# Altium PCB V3.PcbDoc
Units mm, origin at the board's own origin, x right, y up, seen from the top; angles counter-clockwise.
Board outline 63 x 97.64 mm, 2 copper layers (Top Layer, Bottom Layer); 52 components, 39 nets, 195 pads, 74 vias.
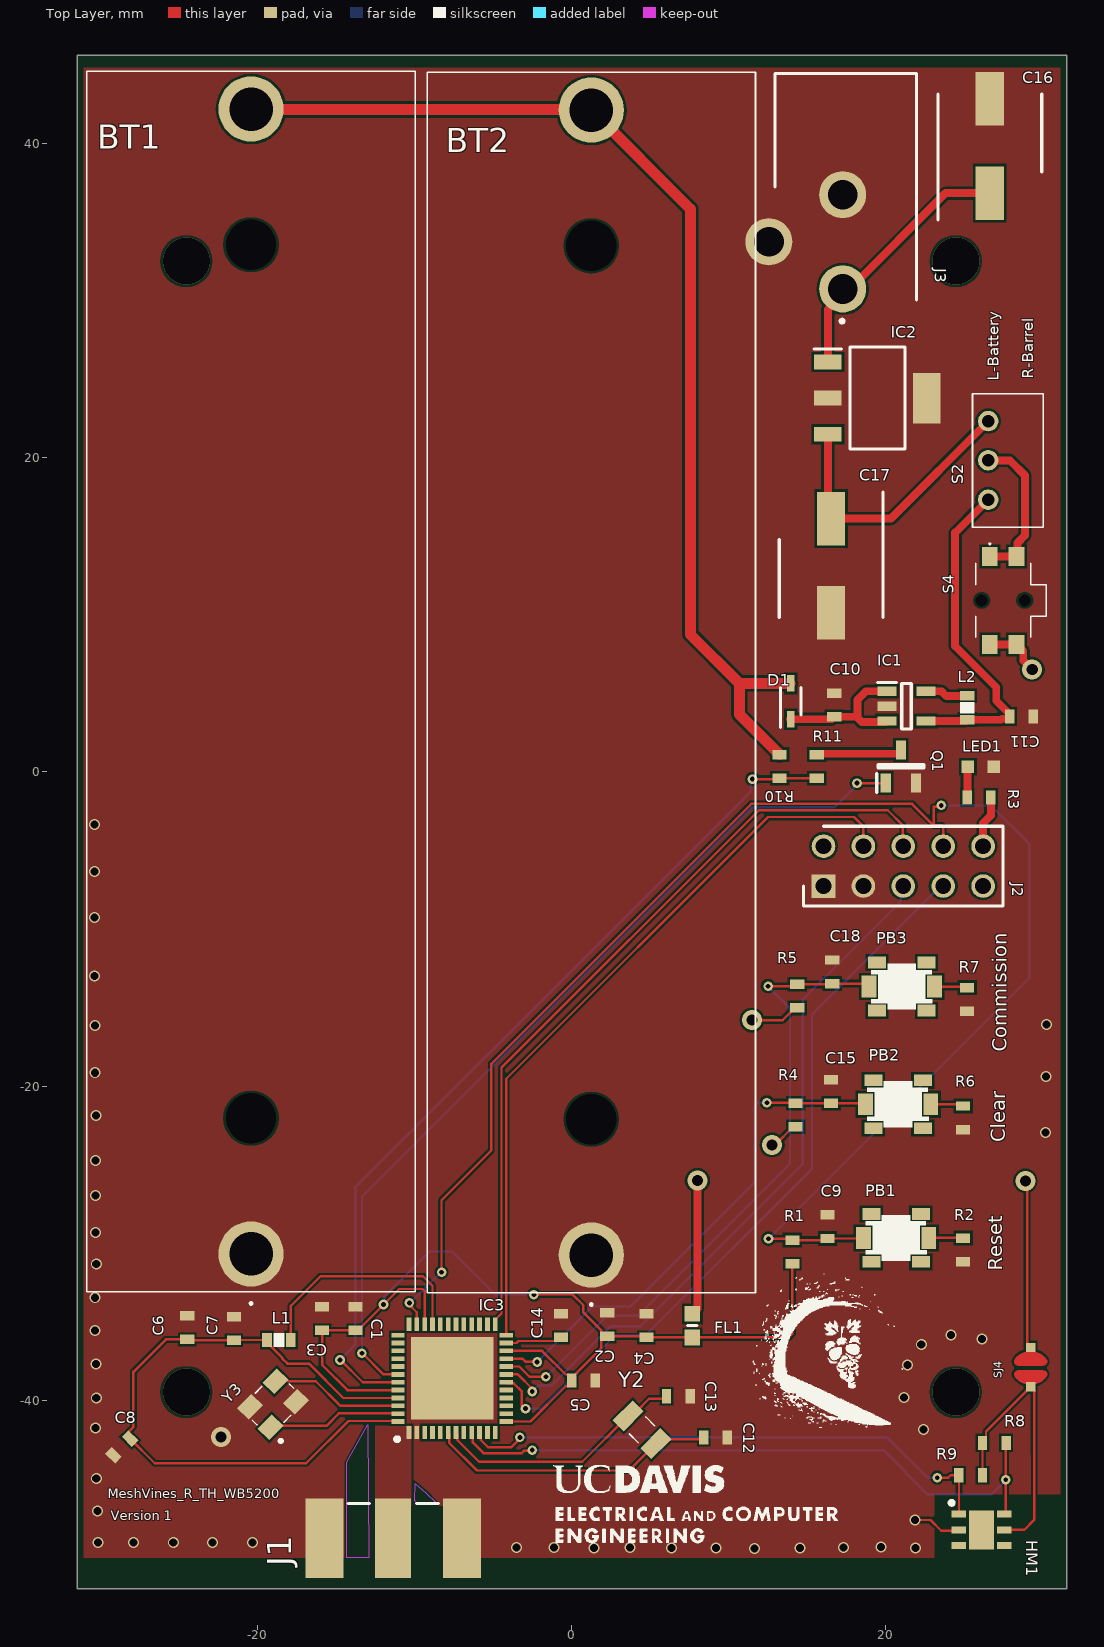
[diagram p0: Top Layer view]
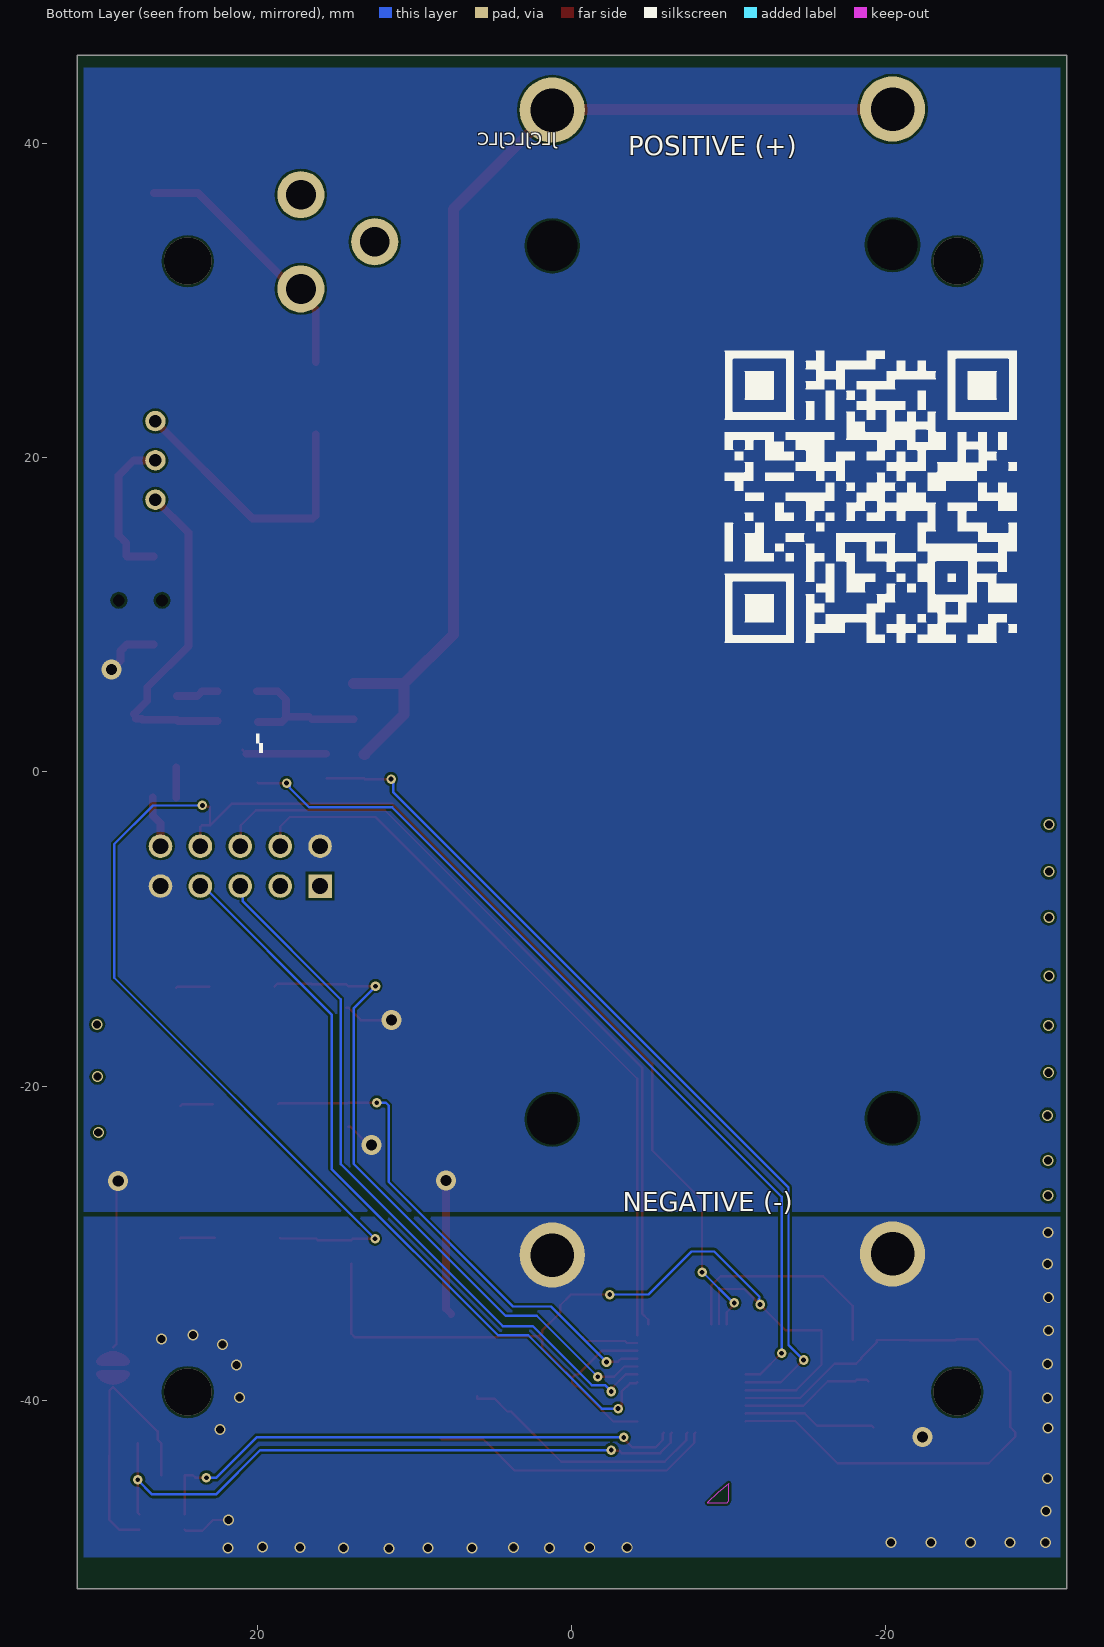
[diagram p1: Bottom Layer view, seen from below]

## Layer stack, top to bottom
Top Solder: solder mask 0.0102, Solder Resist, Dk 3.5
Top Layer: signal copper 0.0356
Dielectric 1: dielectric 0.32, FR-4, Dk 4.8
Bottom Layer: signal copper 0.0356
Bottom Solder: solder mask 0.0102, Solder Resist, Dk 3.5

## Board outline
-31.5,-52 -31.5,45.644 31.5,45.644 31.5,-52

## Design rules (kind name [scope] priority, off if disabled: settings)
BoardOutlineClearance [All] p1: gap=0.406 ignorepadtopadclearanceinfootprint=FALSE except(0: Arc-SplitContinuation Track-SplitContinuation SMDPad-SplitContinuation THPad-SplitContinuation Via-SplitContinuation Fill-SplitContinuation Poly-SplitContinuation Region-SplitContinuation Text-SplitContinuation)
Clearance Clearance_1 [(InNet('RF_P_2_4') AND InComponent('U3'))] p1: gap=0.254 ignorepadtopadclearanceinfootprint=FALSE except(0: Arc-Arc Arc-Track Arc-Fill Arc-Poly Arc-Region Arc-Hole Track-Track Track-Fill Track-Poly Track-Region Track-Hole SMDPad-Hole THPad-Hole Via-Hole Fill-Fill Fill-Poly Fill-Region Fill-Hole Poly-Poly Poly-Region Poly-Hole Region-Region Region-Hole Text-Hole)
Clearance [All] p2: gap=0.152 ignorepadtopadclearanceinfootprint=FALSE
HoleSize [All] p1: absolutevalues=TRUE maxlimit=6.223 minlimit=0.305 maxpercent=80.000 minpercent=20.000
MinimumSolderMaskSliver [All] p1 off: minsoldermaskwidth=0.254
NetAntennae [All] p1 off: netantennaetolerance=0
PolygonConnect PolygonConnect_7 [All vs IsNamedPolygon('Top Layer-GND')] p1: connectstyle=Direct reliefconductorwidth=0.254 reliefentries=4 polygonreliefangle="90 Angle" airgapwidth=0.254
PolygonConnect PolygonConnect_6 [All vs IsNamedPolygon('Bottom Layer-V_Select')] p2: connectstyle=Direct reliefconductorwidth=0.254 reliefentries=4 polygonreliefangle="90 Angle" airgapwidth=0.254
PolygonConnect PolygonConnect_5 [All vs IsNamedPolygon('Top Layer-GND')] p3: connectstyle=Direct reliefconductorwidth=0.254 reliefentries=4 polygonreliefangle="90 Angle" airgapwidth=0.254
PolygonConnect PolygonConnect_4 [All vs IsNamedPolygon('Bottom Layer-GND')] p4: connectstyle=Direct reliefconductorwidth=0.254 reliefentries=4 polygonreliefangle="90 Angle" airgapwidth=0.254
PolygonConnect PolygonConnect_3 [All vs IsNamedPolygon('Top Layer-GND')] p5: thpad.connectstyle=Direct thpad.reliefconductorwidth=0.254 thpad.reliefentries=4 thpad.polygonreliefangle="90 Angle" thpad.airgapwidth=0.254 smdpad.connectstyle=Direct smdpad.reliefconductorwidth=0.254 smdpad.reliefentries=4 smdpad.polygonreliefangle="90 Angle" smdpad.airgapwidth=0.254 via.connectstyle=Relief via.reliefconductorwidth=0.254 via.reliefentries=4 via.polygonreliefangle="90 Angle" via.airgapwidth=0.254
PolygonConnect PolygonConnect_2 [All vs IsNamedPolygon('Top Layer-GND 1')] p6: thpad.connectstyle=Direct thpad.reliefconductorwidth=0.254 thpad.reliefentries=4 thpad.polygonreliefangle="90 Angle" thpad.airgapwidth=0.254 smdpad.connectstyle=Direct smdpad.reliefconductorwidth=0.254 smdpad.reliefentries=4 smdpad.polygonreliefangle="90 Angle" smdpad.airgapwidth=0.254 via.connectstyle=Relief via.reliefconductorwidth=0.254 via.reliefentries=4 via.polygonreliefangle="90 Angle" via.airgapwidth=0.254
PolygonConnect PolygonConnect_1 [All vs IsNamedPolygon('Bottom Layer-GND')] p7: thpad.connectstyle=Direct thpad.reliefconductorwidth=0.254 thpad.reliefentries=4 thpad.polygonreliefangle="90 Angle" thpad.airgapwidth=0.254 smdpad.connectstyle=Direct smdpad.reliefconductorwidth=0.254 smdpad.reliefentries=4 smdpad.polygonreliefangle="90 Angle" smdpad.airgapwidth=0.254 via.connectstyle=Relief via.reliefconductorwidth=0.254 via.reliefentries=4 via.polygonreliefangle="90 Angle" via.airgapwidth=0.254
PolygonConnect antenna_plane [All vs IsNamedPolygon('Top Layer-RF_P_2_4')] p8: thpad.connectstyle=Relief thpad.reliefconductorwidth=0.254 thpad.reliefentries=4 thpad.polygonreliefangle="90 Angle" thpad.airgapwidth=0.254 smdpad.connectstyle=Direct smdpad.reliefconductorwidth=0.254 smdpad.reliefentries=4 smdpad.polygonreliefangle="90 Angle" smdpad.airgapwidth=0.254 via.connectstyle=Relief via.reliefconductorwidth=0.254 via.reliefentries=4 via.polygonreliefangle="90 Angle" via.airgapwidth=0.254
PolygonConnect [All] p9: connectstyle=Relief reliefconductorwidth=0.254 reliefentries=4 polygonreliefangle="90 Angle" airgapwidth=0.254
RoutingVias [All] p1: holewidth=0.305 width=0.61 viastyle="Through Hole" minholewidth=0.152 minwidth=0.305 maxholewidth=0.6 maxwidth=1.2
SilkToSilkClearance [All] p1 off: silktosilkclearance=0.254
SilkToSolderMaskClearance [IsPad] p1 off: minsilkscreentomaskgap=0.254 clearancetoexposedcopper=TRUE
SolderMaskExpansion [All] p1: expansion=0.102
Width [All] p1: maxlimit=2 minlimit=0.152 preferedwidth=0.152 minimp=50.000000 maximp=50.000000 favimp=50.000000
25 further rules are at their usual default settings.

## Classes and differential pairs
component class Sheet3: HM1 R8 R9 SJ4
component class Sheet2: C12 C13 C14 C15 C18 IC3 J1 J2 LED1 PB2 PB3 Q1 R3 R4 R5 R6 R7 R10 R11 Y2 Y3
component class Sheet1: BT1 BT2 C1 C2 C3 C4 C5 C6 C7 C8 C9 C10 C11 C16 C17 D1 FL1 IC1 IC2 J3 L1 L2 PB1 R1 R2 S2 S4

## Components (designator, comment, footprint, x,y, rotation, side; value= is the part's Value field where it differs from the comment)
BT1 "BH-18650-PC" BH18650PC -20.422,-30.692 r90 top
BT2 "BH-18650-PC" BH18650PC 1.245,-30.759 r90 top
C1 "0.1uF" 0603_SMD -13.767,-34.798 r270 top
C2 "0.1uF" 0603_SMD 2.261,-35.191 r270 top
C3 "0.1uF" 0603_SMD -15.9,-34.798 r270 top
C4 "22uF" 0603_SMD 4.75,-35.255 r270 top
C5 "0.1uF" 0603_SMD 0.737,-38.735 r180 top
C6 "22uF" 0603_SMD -24.486,-35.382 r270 top
C7 "0.1uF" 0603_SMD -21.514,-35.433 r270 top
C8 "0.1uF" 0603_SMD -28.651,-42.977 r45 top
C9 "0.1uF" 0603_SMD 16.281,-28.956 r270 top
C10 "4.7uF" 0603_SMD 16.713,4.267 r270 top
C11 "4.7uF" 0603_SMD 28.626,3.531 r180 top
C12 "12pF" 0603_SMD 9.144,-42.367 r180 top
C13 "12pF" 0603_SMD 6.782,-39.751 r180 top
C14 "1uF" 0603_SMD -0.686,-35.255 r270 top
C15 "0.1uF" 0603_SMD 16.51,-20.345 r270 top
C16 "EEE-FK1E330P" CAPAE660X610N 26.619,39.855 r90 top
C17 "EEE-FK1E330P" CAPAE660X610N 16.51,13.132 r270 top
C18 "0.1uF" 0603_SMD 16.586,-12.725 r270 top
D1 "1SS315TPH3F" SOD2513X110N 13.945,4.496 r90 top
FL1 "BLM18HE152SN1B" BEADC1608X95N 7.671,-35.255 r270 top
HM1 "HDC1080DMBT" SON100P300X300X80-7N 26.086,-48.26 r0 top
IC1 "TPS62203DBVR" SOT95P280X145-5N 21.311,4.191 r0 top
IC2 "LM3940IMP-3.3_NOPB" SOT230P700X180-4N 19.456,23.8 r0 top
IC3 "XCC1352R1F3RGZR" QFN50P700X700X100-49N-D -7.62,-38.608 r90 top
J1 "142-0701-801" 142-0701-851 -13.564,-52.984 r180 top
J2 "M20-9980545" HDRV10W80P254_2X5_1270X508X864P 16.027,-7.264 r0 top
J3 "PJ-102A" PJ-102AH 12.947,33.754 r0 top
L1 "Passive-Inductor (Generic)" PASSIVE-INDUCTOR-0603 -18.644,-36.17 r180 top value=6.8uH
L2 "Passive-Inductor (Generic)" PASSIVE-INDUCTOR-0603 25.171,4.089 r270 top value=10uH
LED1 "LED_APTD1608SURCK" LED_APTD1608SURCK 26.873,0.33 r180 top
PB1 "Interface-Push-Button" INTERFACE-PUSH-BUTTON 20.65,-29.667 r180 top value=Single
PB2 "Interface-Push-Button" INTERFACE-PUSH-BUTTON 20.777,-21.158 r180 top value=Single
PB3 "Interface-Push-Button" INTERFACE-PUSH-BUTTON 21.006,-13.665 r180 top value=Single
Q1 "DMN65D8L-7" SOT96P240X100-3N 20.955,0.356 r90 top
R1 "100k" 0603_SMD 14.046,-30.556 r90 top
R2 "1k" 0603_SMD 24.917,-30.429 r270 top
R3 "180" 0603_SMD 25.933,-1.626 r180 top
R4 "100k" 0603_SMD 14.249,-21.844 r90 top
R5 "100k" 0603_SMD 14.351,-14.275 r90 top
R6 "1k" 0603_SMD 24.917,-22.022 r270 top
R7 "1k" 0603_SMD 25.171,-14.478 r270 top
R8 "4.7k" 0603_SMD 26.899,-42.723 r0 top
R9 "4.7k" 0603_SMD 25.4,-44.78 r180 top
R10 "100k" 0603_SMD 13.233,0.356 r270 top
R11 "100k" 0603_SMD 15.596,0.356 r90 top
S2 "MHSS1105" MHSS1105 27.762,19.837 r180 top
S4 "TL1014BF160QG" TL1014BF160QG 27.965,11.049 r90 top
SJ4 "Debug-Solder-Jumper" DEBUG-SOLDER-JUMPER 29.21,-37.948 r90 top
Y2 "FC-135_32.7680KA-AG0" FC135327680KAAG0 4.47,-41.885 r135 top
Y3 "CX2016DB48000C0FPLC1" CX2016DB48000C0FPLC1 -19.025,-40.259 r45 top

## Footprints (in the part's own frame and the unit in brackets; to place one, negate y for a bottom-side part, rotate by r counter-clockwise, add the part's x,y. Pads: shape width x height; smd on the part's side, far side on the other; paste and mask are expansions set on the pad)
142-0701-851 [mm]
  rect 2.413x5.08 smd: 1(-6.572,-4.19) 3(2.191,-4.19)
  rect 2.286x5.08 smd: 2(-2.191,-4.19)
  silkscreen extent -5.07,-6.4 0.69,-6.4, body extent -6.97,-6.1 2.55,8.18, height 4.34
0603_SMD [mm] "0603 Package Size SMD"
  rect 0.6x0.9 smd: 1(-0.75,0) 2(0.75,0)
BEADC1608X95N [mm]
  rect 1x1 smd: 1(-0.75,0) 2(0.75,0)
  silkscreen extent 0,-0.3 0,0.3, body extent -0.8,-0.4 0.8,0.4, height 0.95
BH18650PC [mm]
  round 4.155 hole 2.77: 1(0,0) 2(72.9,0)
  round 1.6 hole 3.2 unplated: MH1(8.645,0) MH2(64.255,0)
  silkscreen extent -3.2,-10.45 75.3,10.45, body extent -2.4,-10.45 75.3,10.45, height 21.31
CAPAE660X610N [mm]
  rect 3.4x1.8 smd: 1(-3,0) 2(3,0)
  silkscreen extent -4.7,-3.3 3.3,3.3, body extent -3.9,-3.4 3.9,3.4, height 6.1
CX2016DB48000C0FPLC1 [mm]
  rect 1.3x1.05 smd: 1(-1.15,-0.925) 2(1.15,-0.925) 3(1.15,0.925) 4(-1.15,0.925)
  silkscreen extent -1.65,-2.1 1.66,1.3
DEBUG-SOLDER-JUMPER [mm]
  rect 0.6x0.6 smd paste-1: 1(-1.202,0) 2(1.3,0)
  Top Layer region: 0.152,-0.77 0.829,-0.5 0.829,0.5 0.152,0.77
  Top Layer region: -0.152,0.77 -0.829,0.5 -0.829,-0.5 -0.152,-0.77
  Top Layer lines w0.5: -0.402,0.819 ccw(c0.171,0) -0.402,-0.819 ; 0.402,0.819 cw(c-0.171,0) 0.402,-0.819
FC135327680KAAG0 [mm]
  rect 1x1.8 smd: 1(-1.25,0) 2(1.25,0)
  silkscreen extent -0.4,-0.75 0.4,0.75
HDRV10W80P254_2X5_1270X508X864P [mm]
  rect 1.5x1.5 hole 1: 1(0,0)
  round 1.5 hole 1: 2(0,2.54) 3(2.54,0) 4(2.54,2.54) 5(5.08,0) 6(5.08,2.54) 7(7.62,0) 8(7.62,2.54) 9(10.16,0) 10(10.16,2.54)
  silkscreen extent -1.27,-1.27 11.43,3.81, body extent -1.27,-1.27 11.43,3.81, height 8.64
INTERFACE-PUSH-BUTTON [mm]
  rect 0.95x1.4 smd: 1(-2.075,0) 2(2.075,0)
  rect 1.15x0.75 smd: NC(-1.575,1.525) NC(-1.575,-1.525) NC(1.575,1.525) NC(1.575,-1.525)
  silkscreen extent -1.95,-1.45 1.95,1.45, body extent -2.21,-1.45 2.29,1.51, height 1.82
LED_APTD1608SURCK [mm]
  rect 0.8x0.8 smd: 1(0,0) 2(1.651,0)
  body extent -0.04,-0.4 1.56,0.4, height 0.95
MHSS1105 [mm]
  round 1.3 hole 0.8: 1(1.25,2.5) 2(1.25,0) 3(1.25,-2.5)
  silkscreen extent -2.25,-4.25 2.25,4.25, body extent -2.25,-4.25 2.25,4.25, height 4
PASSIVE-INDUCTOR-0603 [mil]
  rect 24x36 smd: 1(-30,0) 2(30,0)
  silkscreen extent -14,-18 14,18, body extent -31,-18 31,18, height 29
PJ-102AH [mm]
  round 3 hole 1.9: 1(4.3,-3) 2(4.3,3) 3(-0.4,0)
  silkscreen extent 0,-5.17 9,10.72, body extent -0.64,-3.64 8.76,10.76, height 10.85
QFN50P700X700X100-49N-D [mm]
  rect 0.85x0.3 smd: 1(-3.45,2.75) 2(-3.45,2.25) 3(-3.45,1.75) 4(-3.45,1.25) 5(-3.45,0.75) 6(-3.45,0.25) 7(-3.45,-0.25) 8(-3.45,-0.75) 9(-3.45,-1.25) 10(-3.45,-1.75) 11(-3.45,-2.25) 12(-3.45,-2.75) 25(3.45,-2.75) 26(3.45,-2.25) 27(3.45,-1.75) 28(3.45,-1.25) 29(3.45,-0.75) 30(3.45,-0.25) 31(3.45,0.25) 32(3.45,0.75) 33(3.45,1.25) 34(3.45,1.75) 35(3.45,2.25) 36(3.45,2.75)
  rect 0.3x0.85 smd: 13(-2.75,-3.45) 14(-2.25,-3.45) 15(-1.75,-3.45) 16(-1.25,-3.45) 17(-0.75,-3.45) 18(-0.25,-3.45) 19(0.25,-3.45) 20(0.75,-3.45) 21(1.25,-3.45) 22(1.75,-3.45) 23(2.25,-3.45) 24(2.75,-3.45) 37(2.75,3.45) 38(2.25,3.45) 39(1.75,3.45) 40(1.25,3.45) 41(0.75,3.45) 42(0.25,3.45) 43(-0.25,3.45) 44(-0.75,3.45) 45(-1.25,3.45) 46(-1.75,3.45) 47(-2.25,3.45) 48(-2.75,3.45)
  rect 5.25x5.25 smd: 49(0,0)
  silkscreen extent -4,3.37 -3.75,3.62, body extent -3.55,-3.55 3.55,3.55, height 1
SOD2513X110N [mm]
  rect 1.05x0.5 smd: 1(-1.138,0) 2(1.138,0)
  silkscreen extent -1.66,-0.65 0.88,0.65
SON100P300X300X80-7N [mm]
  rect 0.9x0.45 smd: 1(-1.45,1) 2(-1.45,0) 3(-1.45,-1) 4(1.45,-1) 5(1.45,0) 6(1.45,1)
  rect 1.6x2.5 smd: 7(0,0)
  silkscreen extent -2.02,1.6 -1.77,1.85, body extent -1.55,-1.5 1.55,1.5, height 0.8
SOT95P280X145-5N [mm]
  rect 1.2x0.6 smd: 1(-1.25,0.95) 2(-1.25,0) 3(-1.25,-0.95) 4(1.25,-0.95) 5(1.25,0.95)
  silkscreen extent -1.85,-1.45 0.3,1.5, body extent -1.4,-1.45 1.4,1.45, height 1.45
SOT96P240X100-3N [mm]
  rect 1.2x0.65 smd: 1(-1.05,0.96) 2(-1.05,-0.96) 3(1.05,0)
  silkscreen extent -1.65,-1.45 0.1,1.54, body extent -1.2,-1.45 1.2,1.45, height 1
SOT230P700X180-4N [mm]
  rect 1.75x0.95 smd: 1(-3.15,2.3) 2(-3.15,0) 3(-3.15,-2.3)
  rect 1.75x3.2 smd: 4(3.15,0)
  silkscreen extent -4.02,-3.25 1.75,3.25, body extent -3.5,-3.25 3.5,3.25, height 1.8
TL1014BF160QG [mm]
  rect 1.2x1 smd: 1(2.675,1.35) 2(2.675,-0.35) 3(-2.925,1.35) 4(-2.925,-0.35)
  round 0.375 hole 0.75 unplated: 5(-0.125,1.875) 6(-0.125,-0.875)
  silkscreen extent -2.47,-2.25 3.52,2.25

## Part data
BT1 BT2: "Battery", Manufacturer_Name="MPD (Memory Protection Devices)", Datasheet Link=http://www.memoryprotectiondevices.com/datasheets/BH-18650-PC-datasheet.pdf, Height=21.31mm, Manufacturer_Part_Number=BH-18650-PC
C1 C2 C3 C4 C5 C6 C7 C8 C9 C10 C11 C12 C13 C14 C15 C18: library part C_0603
C16 C17: "Capacitor Polarised", Manufacturer_Name=Panasonic, Mouser Part Number=667-EEE-FK1E330P, Allied_Number=70258257, Allied Price/Stock=https://www.alliedelec.com/panasonic-eee-fk1e330p/70258257/, Datasheet Link=https://industrial.panasonic.com/cdbs/www-data/pdf/RDE0000/ABA0000C1181.pdf, Height=6.1mm, Manufacturer_Part_Number=EEE-FK1E330P, Mouser Price/Stock=https://www.mouser.com/Search/Refine.aspx?Keyword=667-EEE-FK1E330P
D1: "Schottky Diode", Manufacturer_Name=Toshiba, Mouser Part Number=757-1SS315TPH3F, Datasheet Link=http://toshiba.semicon-storage.com/info/docget.jsp?did=2666&prodName=1SS315, Height=1.1mm, Manufacturer_Part_Number=1SS315TPH3F, Mouser Price/Stock=https://www.mouser.com/Search/Refine.aspx?Keyword=757-1SS315TPH3F
FL1: "Filter", Manufacturer_Name="Murata Electronics", Mouser Part Number=N/A, Datasheet Link=https://www.murata.com/en-us/products/productdetail?partno=BLM18HE152SN1%23, Height=0.95mm, Manufacturer_Part_Number=BLM18HE152SN1B, Mouser Price/Stock=https://www.mouser.com/Search/Refine.aspx?Keyword=N%2FA
HM1: "Hygrometer", Manufacturer_Name="Texas Instruments", Mouser Part Number=595-HDC1080DMBT, RS Part Number=1330170P, Datasheet Link=http://www.mouser.com/ds/2/405/hdc1080-844688.pdf, Height=0.8mm, Manufacturer_Part_Number=HDC1080DMBT, Mouser Price/Stock=https://www.mouser.com/Search/Refine.aspx?Keyword=595-HDC1080DMBT, RS Price/Stock=http://uk.rs-online.com/web/p/products/1330170P
IC1: "Integrated Circuit", Manufacturer_Name="Texas Instruments", Mouser Part Number=595-TPS62203DBVR, Datasheet Link=http://www.ti.com/lit/ds/symlink/tps62203.pdf, Height=1.45mm, Manufacturer_Part_Number=TPS62203DBVR, Mouser Price/Stock=https://www.mouser.com/Search/Refine.aspx?Keyword=595-TPS62203DBVR
IC2: "Integrated Circuit", Manufacturer_Name="Texas Instruments", Manufacturer_Part_Number=LM3940IMP-3.3/NOPB, Mouser Part Number=926-LM3940IMP3.3NOPB, RS Part Number=5361546P, Datasheet Link=http://www.ti.com/lit/ds/symlink/lm3940.pdf, Height=1.8mm, Mouser Price/Stock=https://www.mouser.com/Search/Refine.aspx?Keyword=926-LM3940IMP3.3NOPB, RS Price/Stock=http://uk.rs-online.com/web/p/products/5361546P
IC3: "Integrated Circuit", Manufacturer_Name="Texas Instruments", Datasheet Link=http://www.ti.com/lit/gpn/cc1352r, Height=1mm, Manufacturer_Part_Number=XCC1352R1F3RGZR
J1: "Connector", Manufacturer_Name=Cinch, Mouser Part Number=530-142-0701-801, RS Part Number=8861070, Allied_Number=70090267, Allied Price/Stock=https://www.alliedelec.com/johnson-cinch-connectivity-solutions-142-0701-801/70090267/, Datasheet Link=http://www.farnell.com/datasheets/2048966.pdf, Manufacturer_Part_Number=142-0701-801, Mouser Price/Stock=https://www.mouser.com/Search/Refine.aspx?Keyword=530-142-0701-801, RS Price/Stock=http://uk.rs-online.com/web/p/products/8861070
J2: "Connector", Manufacturer_Name=HARWIN, Mouser Part Number=855-M20-9980545, RS Part Number=6812950P, Allied_Number=R1053034, Allied Price/Stock=https://www.alliedelec.com/harwin-m20-9980545/R1053034/, Datasheet Link=https://componentsearchengine.com/Datasheets/2/M20-9980545.pdf, Height=8.64mm, Manufacturer_Part_Number=M20-9980545, Mouser Price/Stock=https://www.mouser.com/Search/Refine.aspx?Keyword=855-M20-9980545, RS Price/Stock=http://uk.rs-online.com/web/p/products/6812950P
J3: "Connector", Manufacturer_Name=CUI, Mouser Part Number=490-PJ-102A, Datasheet Link=https://www.cui.com/product/resource/pj-102a.pdf, Manufacturer_Part_Number=PJ-102A, Mouser Price/Stock=https://www.mouser.com/Search/Refine.aspx?Keyword=490-PJ-102A
L1 L2: "Generic Inductor", Category=Passive, Supplier 1=Mouser, Supplier 2=Digi-Key
PB1 PB2 PB3: "2.5mm Tall, 2.5N Force, Straight, SMD, Push Button", Manufacturer="C&K Components", Manufacturer Part Number="PTS820 J25K SMTR LFS", Package=SMD-6, Supplier Part Number 1=611-PTS820J25KSMTR, Category=Interface, ComponentLink1Description=Datasheet, ComponentLink1URL=https://www.mouser.com/datasheet/2/60/pts820-1382642.pdf, Supplier 1=Mouser, Supplier 2=Digi-Key, Supplier Part Number 2=CKN10897CT-ND, Through Hole (y/n)=N
Q1: "MOSFET (N-Channel)", Manufacturer_Name="Diodes Inc.", Mouser Part Number=621-DMN65D8L-7, RS Part Number=8232952P, Allied_Number=70550687, Allied Price/Stock=https://www.alliedelec.com/diodes-inc-dmn65d8l-7/70550687/, Datasheet Link=https://www.diodes.com/assets/Datasheets/DMN65D8L.pdf, Height=1mm, Manufacturer_Part_Number=DMN65D8L-7, Mouser Price/Stock=https://www.mouser.com/Search/Refine.aspx?Keyword=621-DMN65D8L-7, RS Price/Stock=http://uk.rs-online.com/web/p/products/8232952P
R1 R2 R3 R4 R5 R6 R7 R8 R9 R10 R11: library part R_0603
S2: "Switch", Manufacturer_Name=Apem, Mouser Part Number=642-MHSS1105, Datasheet Link=https://componentsearchengine.com/Datasheets/2/MHSS1105.pdf, Height=4mm, Manufacturer_Part_Number=MHSS1105, Mouser Price/Stock=https://www.mouser.com/Search/Refine.aspx?Keyword=642-MHSS1105
S4: "Switch", Manufacturer_Name=E-Switch, Mouser Part Number=612-TL1014BF160QG, Datasheet Link=https://www.e-switch.com/system/asset/product_line/data_sheet/141/TL1014.pdf, Height=1mm, Manufacturer_Part_Number=TL1014BF160QG, Mouser Price/Stock=https://www.mouser.com/Search/Refine.aspx?Keyword=612-TL1014BF160QG
SJ4: "3.5mm Diameter, Solder Jumper Pad", Category=Debug
Y2: "Crystal or Oscillator", Manufacturer_Name="Epson Timing", Manufacturer_Part_Number="FC-135 32.7680KA-AG0", Mouser Part Number=732-FC135-32.76KAAG0, Datasheet Link=https://support.epson.biz/td/api/doc_check.php?dl=brief_FC-135&lang=en/.pdf, Height=0mm, Mouser Price/Stock=https://www.mouser.com/Search/Refine.aspx?Keyword=732-FC135-32.76KAAG0
Y3: "Crystal or Oscillator", Manufacturer_Name="Kyocera Electronic Components", Mouser Part Number=581-CX2016DB48CFPLC1, Datasheet Link=https://componentsearchengine.com/Datasheets/1/CX2016DB48000C0FPLC1.pdf, Manufacturer_Part_Number=CX2016DB48000C0FPLC1, Mouser Price/Stock=https://www.mouser.com/Search/Refine.aspx?Keyword=581-CX2016DB48CFPLC1

## Via types
v1: diameter 0.7, hole 0.511, Top Layer to Bottom Layer, 44 vias
v2: diameter 0.61, hole 0.305, Top Layer to Bottom Layer, 20 vias
v3: diameter 1.27, hole 0.711, Top Layer to Bottom Layer, 6 vias
v4: diameter 3, hole 3, Top Layer to Bottom Layer, 4 vias

## Nets (pads, with @x,y where several pads share a name; then routed paths per layer and width w, separated by ;. In a path a pad name is that pad's centre, name@x,y a point inside that pad or via, vN(x,y) a via of type N, cw(c..) or ccw(c..) an arc to the next point about the centre after c; other vN are vias at no path point)
BATT_ADC: IC3.43 R10.2 R11.1 | length 56.3
  Top Layer w0.152: v2(-14.757,-37.44) -14.732,-37.44 -13.314,-38.858 IC3.43 ; v2(11.506,-0.457) 13.171,-0.457 R10.2 R11.1
  Bottom Layer w0.152: v2(-14.757,-37.44) -13.799,-36.481 -13.799,-26.448 11.379,-1.27 11.379,-0.546 11.468,-0.457 v2(11.506,-0.457)
BATT_ADC_EN: IC3.42 Q1.1 | length 57.2
  Top Layer w0.152: v2(-13.36,-37.008) -13.335,-37.008 -11.985,-38.358 IC3.42 ; v2(18.161,-0.711) 19.978,-0.711 Q1.1
  Bottom Layer w0.152: v2(-13.36,-37.008) -13.36,-27.051 11.43,-2.261 16.713,-2.261 17.958,-1.016 17.958,-0.8 18.047,-0.711 v2(18.161,-0.711)
DCDC_SW: IC3.33 L1.1 | length 14.7
  Top Layer w0.152: L1.1 -17.882,-33.985 -16.002,-32.106 -9.474,-32.106 -8.87,-32.71 IC3.33
DIO14: C18.2 IC3.20 PB3.2 R5.2 | length 42.4
  Top Layer w0.152: IC3.20 -3.341,-37.858 -2.692,-38.506 v2(-1.651,-38.506) ; v2(12.497,-13.64) 14.236,-13.64 R5.2 16.537,-13.525 C18.2 18.741,-13.475 PB3.2
  Bottom Layer w0.152: v2(-1.651,-38.506) 2.235,-34.62 4.216,-34.62 13.894,-24.943 13.894,-15.062 12.497,-13.665 v2(12.497,-13.64)
DIO15: C15.2 IC3.21 PB2.2 R4.2 | length 32.7
  Top Layer w0.152: IC3.21 -3.13,-37.358 -2.946,-37.541 -2.235,-37.541 v2(-2.21,-37.567) ; v2(12.421,-21.057) 14.212,-21.057 R4.2 16.509,-21.094 C15.2 18.639,-21.095 PB2.2
  Bottom Layer w0.152: v2(-2.21,-37.567) 1.321,-34.036 3.734,-34.036 11.659,-26.111 11.659,-21.247 11.849,-21.057 v2(12.421,-21.057)
DIO16_TDO: IC3.26
DIO17_TDI: IC3.40
DIO18_SWO: IC3.41
GND: BT1.1 BT2.1 C1.1 C2.1 C3.1 C4.1 C5.1 C6.1 C7.1 C8.1 C9.1 C10.1 C11.1 C12.1 C13.1 C14.1 C15.1 C16.2 C17.2 C18.1 HM1.2 IC1.2 IC2.2 IC2.4 IC3.2 IC3.49 J1.1 J1.3 J2.1 J2.3 J3.2 J3.3 LED1.1 Q1.2 R2.2 R6.2 R7.2 Y3.2 Y3.4 | length 3.1
  Top Layer w0.152: v1(21.844,-47.625) 22.835,-47.625 23.52,-48.311 24.585,-48.311 HM1.2
  other v1: 11.633,-49.428 1.422,-49.403 6.35,-49.403 9.169,-49.403 14.529,-49.403 21.895,-49.403 -3.531,-49.378 -1.143,-49.378 3.708,-49.378 17.297,-49.378 19.685,-49.352 -30.175,-49.073 -27.915,-49.073 -25.375,-49.047 -22.885,-49.047 -20.32,-49.047 -30.201,-47.041 -30.277,-44.983 22.403,-41.859 -30.328,-41.783 -30.277,-39.853 21.158,-39.827 21.361,-37.77 -30.302,-37.694 22.25,-36.449 26.111,-36.119 24.13,-35.839 -30.353,-35.56 -30.353,-33.477 -30.277,-31.344 -30.328,-29.337 -30.328,-26.975 -30.328,-24.74 30.15,-22.962 -30.302,-21.869 30.201,-19.406 -30.353,-19.152 -30.353,-16.154 30.226,-16.078 -30.378,-12.979 -30.378,-9.271 -30.378,-6.35 -30.378,-3.353
  other v3: -22.327,-42.342
hot1: IC3.47 Y3.1 | length 8.5
  Top Layer w0.152: Y3.1 -19.095,-41.638 -15.628,-41.638 -14.834,-40.843 -11.085,-40.843 IC3.47
hot2: IC3.46 Y3.3 | length 8.5
  Top Layer w0.152: Y3.3 -18.777,-38.703 -18.142,-38.703 -18.054,-38.792 -16.301,-38.792 -14.732,-40.361 -11.073,-40.361 IC3.46
I2C_SCL: HM1.6 IC3.9 R8.2 | length 41.1
  Top Layer w0.152: IC3.9 -6.296,-42.132 -6.296,-42.7 -5.626,-43.371 -3.188,-43.371 -3.048,-43.231 -2.565,-43.231 v2(-2.515,-43.18) ; HM1.6 27.635,-47.161 v2(27.635,-45.06) 27.635,-42.736 R8.2
  Bottom Layer w0.152: v2(-2.515,-43.18) 19.837,-43.18 22.657,-45.999 26.721,-45.999 27.635,-45.085 v2(27.635,-45.06)
I2C_SDA: HM1.1 IC3.10 R9.2 | length 35.1
  Top Layer w0.152: IC3.10 -5.796,-42.132 -5.796,-42.53 -5.324,-43.002 -3.861,-43.002 -3.302,-42.443 v2(-3.302,-42.367) ; v2(23.266,-44.933) 23.969,-44.933 24.121,-44.78 R9.2 24.65,-47.246 HM1.1
  Bottom Layer w0.152: v2(-3.302,-42.367) 20.066,-42.367 22.631,-44.933 v2(23.266,-44.933)
JTAG_TCKC: IC3.25 J2.6 | length 50.6
  Top Layer w0.152: IC3.25 -4.87,-34.883 -4.475,-34.488 -4.475,-18.826 11.913,-2.438 20.117,-2.438 21.082,-3.404 21.082,-4.699 J2.6
JTAG_TMSC: IC3.24 J2.4 | length 47.5
  Top Layer w0.152: IC3.24 -4.17,-19.537 12.497,-2.87 17.958,-2.87 18.567,-3.48 J2.4
NetC10_2: C10.2 D1.1 IC1.1 IC1.3 | length 9.6
  Top Layer w0.152: C10.2@16.554,3.358 C10.2 ; 18.124,3.517 18.186,3.58 ; IC1.3@19.995,3.175 IC1.3
  Top Layer w0.5: D1.1@13.894,3.358 C10.2@16.554,3.358 ; C10.2 18.124,3.517 18.466,3.175 IC1.3@19.995,3.175 ; 18.186,3.58 18.186,4.597 18.73,5.141 IC1.1
NetC12_2: C12.2 IC3.6 Y2.1 | length 18.5
  Top Layer w0.152: IC3.6 -7.809,-42.119 -7.809,-42.712 -6.045,-44.475 3.647,-44.475 Y2.1 5.637,-42.486 8.276,-42.486 C12.2
NetC13_2: C13.2 IC3.7 Y2.2 | length 16.2
  Top Layer w0.152: IC3.7 -7.296,-42.132 -7.296,-42.53 -5.91,-43.917 0.671,-43.917 Y2.2 3.869,-40.718 4.111,-40.718 4.928,-39.901 6.032,-39.901 C13.2
NetC14_2: C14.2 IC3.23 | length 3.6
  Top Layer w0.152: IC3.23 -3.516,-36.358 -3.387,-36.229 -0.91,-36.229 C14.2
NetC16_1: C16.1 IC2.1 J3.1 | length 16.9
  Top Layer w0.152: J3.1@17.247,30.392 J3.1 J3.1@17.698,30.754
  Top Layer w0.5: IC2.1 16.306,29.452 J3.1@17.247,30.392 ; J3.1@17.698,30.754 23.8,36.855 C16.1
NetHM1_5: HM1.5 R8.1 R9.1 SJ4.1 | length 17.6
  Top Layer w0.152: R9.1 26.149,-44.779 R8.1 26.372,-42.499 26.372,-41.988 SJ4.1 29.434,-39.374 29.434,-43.497 29.439,-43.502 29.439,-47.625 28.804,-48.26 HM1.5
NetIC1_5: IC1.5 L2.1 | length 2.8
  Top Layer w0.152: L2.1@25.146,4.826 L2.1
  Top Layer w0.5: IC1.5 23.536,5.141 23.851,4.826 L2.1@25.146,4.826
NetJ2_10: J2.10 R3.1 | length 3.3
  Top Layer w0.5: J2.10 26.187,-3.265 26.683,-2.769 R3.1
NetLED1_2: LED1.2 R3.2 | length 2
  Top Layer w0.152: LED1.2@25.183,0.291 LED1.2
  Top Layer w0.5: R3.2 LED1.2@25.183,0.291
NetPB1_1: PB1.1 R2.1 | length 2.2
  Top Layer w0.152: PB1.1 24.905,-29.667 R2.1
NetPB2_1: PB2.1 R6.1 | length 2.1
  Top Layer w0.152: PB2.1 24.804,-21.158 R6.1
NetPB3_1: PB3.1 R7.1 | length 2.1
  Top Layer w0.152: PB3.1 25.109,-13.665 R7.1
NetQ1_3: Q1.3 R11.2 | length 5.5
  Top Layer w0.152: R11.2 R11.2@15.647,1.157 ; Q1.3@20.706,1.157 Q1.3
  Top Layer w0.5: R11.2@15.647,1.157 Q1.3@20.706,1.157
NetS2_2: S2.2 S4.1 S4.2 | length 9.8
  Top Layer w0.152: S4.2 S4.2@28.372,13.78
  Top Layer w0.5: S2.2 27.889,19.837 28.854,18.872 28.854,15.062 28.372,14.58 S4.2@28.372,13.78 ; S4.1 S4.2
RESET_N: C9.2 IC3.35 J2.8 PB1.2 R1.2 | length 102.9
  Top Layer w0.152: v2(-10.338,-33.807) -10.338,-33.934 -9.87,-34.402 IC3.35 ; v2(-8.293,-31.852) -8.293,-27.267 -5.125,-24.099 -5.125,-18.587 11.43,-2.032 21.666,-2.032 23.038,-3.404 ; v2(12.522,-29.718) 13.958,-29.718 R1.2 16.181,-29.806 C9.2 18.536,-29.706 PB1.2 ; v2(23.52,-2.134) 23.433,-2.221 23.04,-2.221 23.038,-2.223 23.038,-3.404 ; J2.8 23.647,-3.493 23.558,-3.404 23.038,-3.404
  Bottom Layer w0.152: v2(-10.338,-33.807) -10.293,-33.807 -8.338,-31.852 v2(-8.293,-31.852) ; v2(12.522,-29.718) 29.134,-13.106 29.134,-4.597 26.67,-2.134 v2(23.52,-2.134)
RF_P_2_4: IC3.1 J1.2
UART_RX: IC3.18 J2.7 | length 48.6
  Top Layer w0.152: IC3.18 -4.096,-38.932 -3.698,-38.932 -3.175,-39.455 -3.175,-40.398 -3.035,-40.538 v2(-2.946,-40.538)
  Bottom Layer w0.152: v2(-2.946,-40.538) -1.905,-40.538 2.769,-35.865 4.699,-35.865 15.291,-25.273 15.291,-15.443 23.47,-7.264 J2.7
UART_TX: IC3.19 J2.5 | length 45.8
  Top Layer w0.152: IC3.19 -3.425,-38.358 -2.514,-39.269 -2.514,-39.395 v2(-2.515,-39.446)
  Bottom Layer w0.152: v2(-2.515,-39.446) -2.108,-39.04 -1.27,-39.04 2.489,-35.281 4.394,-35.281 14.707,-24.968 14.707,-14.478 20.942,-8.243 20.942,-7.43 J2.5
V_Barrel: C17.1 IC2.3 S2.3 | length 18
  Top Layer w0.152: C17.1@16.306,16.335 C17.1 ; S2.3@26.512,22.321 S2.3
  Top Layer w0.5: C17.1@16.306,16.335 IC2.3 ; C17.1 20.323,16.132 S2.3@26.512,22.321
V_Batt: BT1.2 BT2.2 D1.2 R10.1 | length 70.9
  Top Layer w0.152: BT1.2 BT1.2@-20.391,42.178 ; BT2.2@1.215,42.178 BT2.2@1.245,42.148
  Top Layer w0.7: BT1.2@-20.391,42.178 BT2.2@1.215,42.178 ; BT2.2@1.245,42.148 7.544,35.848 7.544,8.763 10.673,5.634 ; R10.1 13.183,1.106 13.133,1.156 13.133,1.206 10.673,3.666 10.673,5.634 ; D1.2@13.894,5.634 10.673,5.634
V_Select: FL1.1 J2.2 J2.9 R4.1 R5.1 S4.3 S4.4 SJ4.2 | length 28.3
  Top Layer w0.152: v3(11.481,-15.799) 13.427,-15.799 14.201,-15.025 R5.1 ; v3(12.751,-23.749) 12.944,-23.749 14.099,-22.594 R4.1 ; v3(28.88,-26.035) 28.986,-26.141 28.986,-36.424 SJ4.2
  Top Layer w0.5: FL1.1 8.001,-34.175 v3(8.001,-26.01) ; S4.3 S4.4 28.739,7.7 28.739,7.1 v3(29.312,6.528)
V_Switch: C11.2 IC1.4 L2.2 S2.1 | length 21.5
  Top Layer w0.152: L2.2@25.085,3.241 L2.2 ; 27.344,3.327 27.407,3.39 ; C11.2@27.735,3.39 C11.2 C11.2@27.876,3.681
  Top Layer w0.5: IC1.4 L2.2@25.085,3.241 ; L2.2 27.344,3.327 ; S2.1 24.409,15.235 24.409,8.001 27.026,5.385 27.026,4.531 C11.2@27.876,3.681 ; 27.407,3.39 C11.2@27.735,3.39
VDDR: C6.2 C7.2 C8.2 IC3.45 IC3.48 L1.2 | length 42.6
  Top Layer w0.152: IC3.48 -11.102,-41.326 -14.224,-41.326 -16.916,-44.018 -26.549,-44.018 C8.2 -28.227,-42.34 -28.227,-42.024 -27.915,-41.712 -27.915,-38.202 -25.845,-36.132 C6.2 -24.435,-36.183 C7.2 -21.5,-36.17 L1.2 -19.406,-36.322 -18.44,-37.287 -18.44,-37.338 -18.11,-37.668 -16.739,-37.668 -14.549,-39.858 IC3.45
VDDS: C1.2 C2.2 C3.2 C4.2 C5.2 FL1.2 IC3.13 IC3.22 IC3.34 IC3.44 R1.1 | length 66.3
  Top Layer w0.152: IC3.44 -14.287,-39.358 -15.9,-37.744 C3.2 C1.2 -13.617,-35.548 -10.987,-32.918 -9.487,-32.918 -9.37,-33.036 IC3.34 ; IC3.13 -2.636,-41.358 -0.387,-39.109 -0.237,-39.109 -0.013,-38.885 C5.2 C5.2@-0.013,-38.585 ; IC3.22 -1.89,-36.858 -0.387,-38.361 -0.237,-38.361 C5.2@-0.013,-38.585 ; v2(-2.413,-33.274) 0.051,-33.274 0.737,-33.96 0.737,-34.417 1.887,-35.567 1.887,-35.717 C2.2@2.111,-35.941 ; R1.1 14.046,-35.765 13.806,-36.005 FL1.2 C4.2 4.686,-35.941 C2.2 C2.2@2.111,-35.941 ; C5.2@-0.013,-38.585 1.887,-36.685 1.887,-36.165 C2.2@2.111,-35.941
  Bottom Layer w0.152: v2(-11.989,-33.909) -11.913,-33.833 -11.913,-33.579 -11.951,-33.54 -11.951,-33.414 -9.068,-30.531 -7.62,-30.531 -4.877,-33.274 v2(-2.413,-33.274)
pads on no net: BT1.MH1 BT1.MH2 BT2.MH1 BT2.MH2 HM1.3 HM1.4 HM1.7 IC3.3 IC3.4 IC3.5 IC3.8 IC3.11 IC3.12 IC3.14 IC3.15 IC3.16 IC3.17 IC3.27 IC3.28 IC3.29 IC3.30 IC3.31 IC3.32 IC3.36 IC3.37 IC3.38 IC3.39 PB1.NC PB2.NC PB3.NC S4.5 S4.6
copper on no net:
  other v4: -24.538,-39.484 24.452,-39.484 -24.538,32.525 24.452,32.525

## Polygon pours and split planes (outlines as drawn)
GND on Top Layer "Top Layer-GND" (solid, pour order 10): 31.115,-50.038 31.115,44.831 -31.09,44.831 -31.09,-50.038
RF_P_2_4 on Top Layer "Top Layer-RF_P_2_4" (solid, pour order 6): -10.236,-41.631 -10.236,-46.711 -12.522,-46.711 -12.522,-41.631
no net on Top Layer "Top Layer-No Net 3" (solid, pour order 14): -10.236,-41.631
no net on Top Layer "Top Layer-No Net 4" (solid, pour order 13): -11.932,-46.736
no net on Top Layer "Top Layer-No Net 1" (solid, pour order 11): -31.14,-44.399
no net on Top Layer "Top Layer-No Net 2" (solid, pour order 9): -31.09,-44.45
no net on Top Layer "Top Layer-No Net" (solid, pour order 7): -13.843,-44.577
V_Select on Bottom Layer "Bottom Layer-V_Select" (solid, pour order 12): -31.115,-28.016 31.09,-28.016 31.09,44.831 -31.115,44.831 -31.115,-27.534
GND on Bottom Layer "Bottom Layer-GND" (solid, pour order 8): -31.09,-49.987 -31.09,-28.321 31.115,-28.321 31.09,-28.346 31.09,-49.987

## Keep-outs
Top Layer:
  region: -14.326,-50.038 -14.326,-43.956 -13.005,-41.58 -12.916,-50.038
Keep-Out Layer:
  region: -9.9,-46.542 -9.986,-46.412 -9.979,-45.305 -9.288,-45.889 -8.636,-46.542

## Other copper
Top Layer:
  pour cut-out: 23.063,-45.974 31.09,-45.974 31.09,-45.999 31.09,-46.05 31.09,-50.241 23.063,-50.241
  pour cut-out: -13.729,-52.273 -7.531,-52.273 -7.531,-46.736 -13.729,-46.736 -13.729,-52.248

## Silkscreen, mask and mechanical layers (free items; w line width, h text height)
Top Overlay:
  drawing of 217 lines, arcs and shapes, not listed
  text "R-Barrel" at 29.388,25.019 h0.7 r90
  text "L-Battery" at 27.178,24.917 h0.7 r90
  text "Commission" at 27.686,-17.805 h0.9 r90
  text "Clear" at 27.584,-23.571 h0.9 r90
  text "Reset" at 27.407,-31.75 h0.9 r90
  text "MeshVines_R_TH_WB5200" at -29.54,-46.253 h0.6
  text "Version 1" at -29.362,-47.65 h0.6
Bottom Overlay:
  drawing of 47 lines, arcs and shapes, not listed
  text "JLCJLCJLC" at 0.965,39.903 h0.8
  text "POSITIVE (+)" at -3.607,39.268 h1.2
  text "NEGATIVE (-)" at -3.251,-27.965 h1.2
Board Outline:
  the board outline again, w0.254